# EAGLE board Joystick (EAGLE 9.6.0)
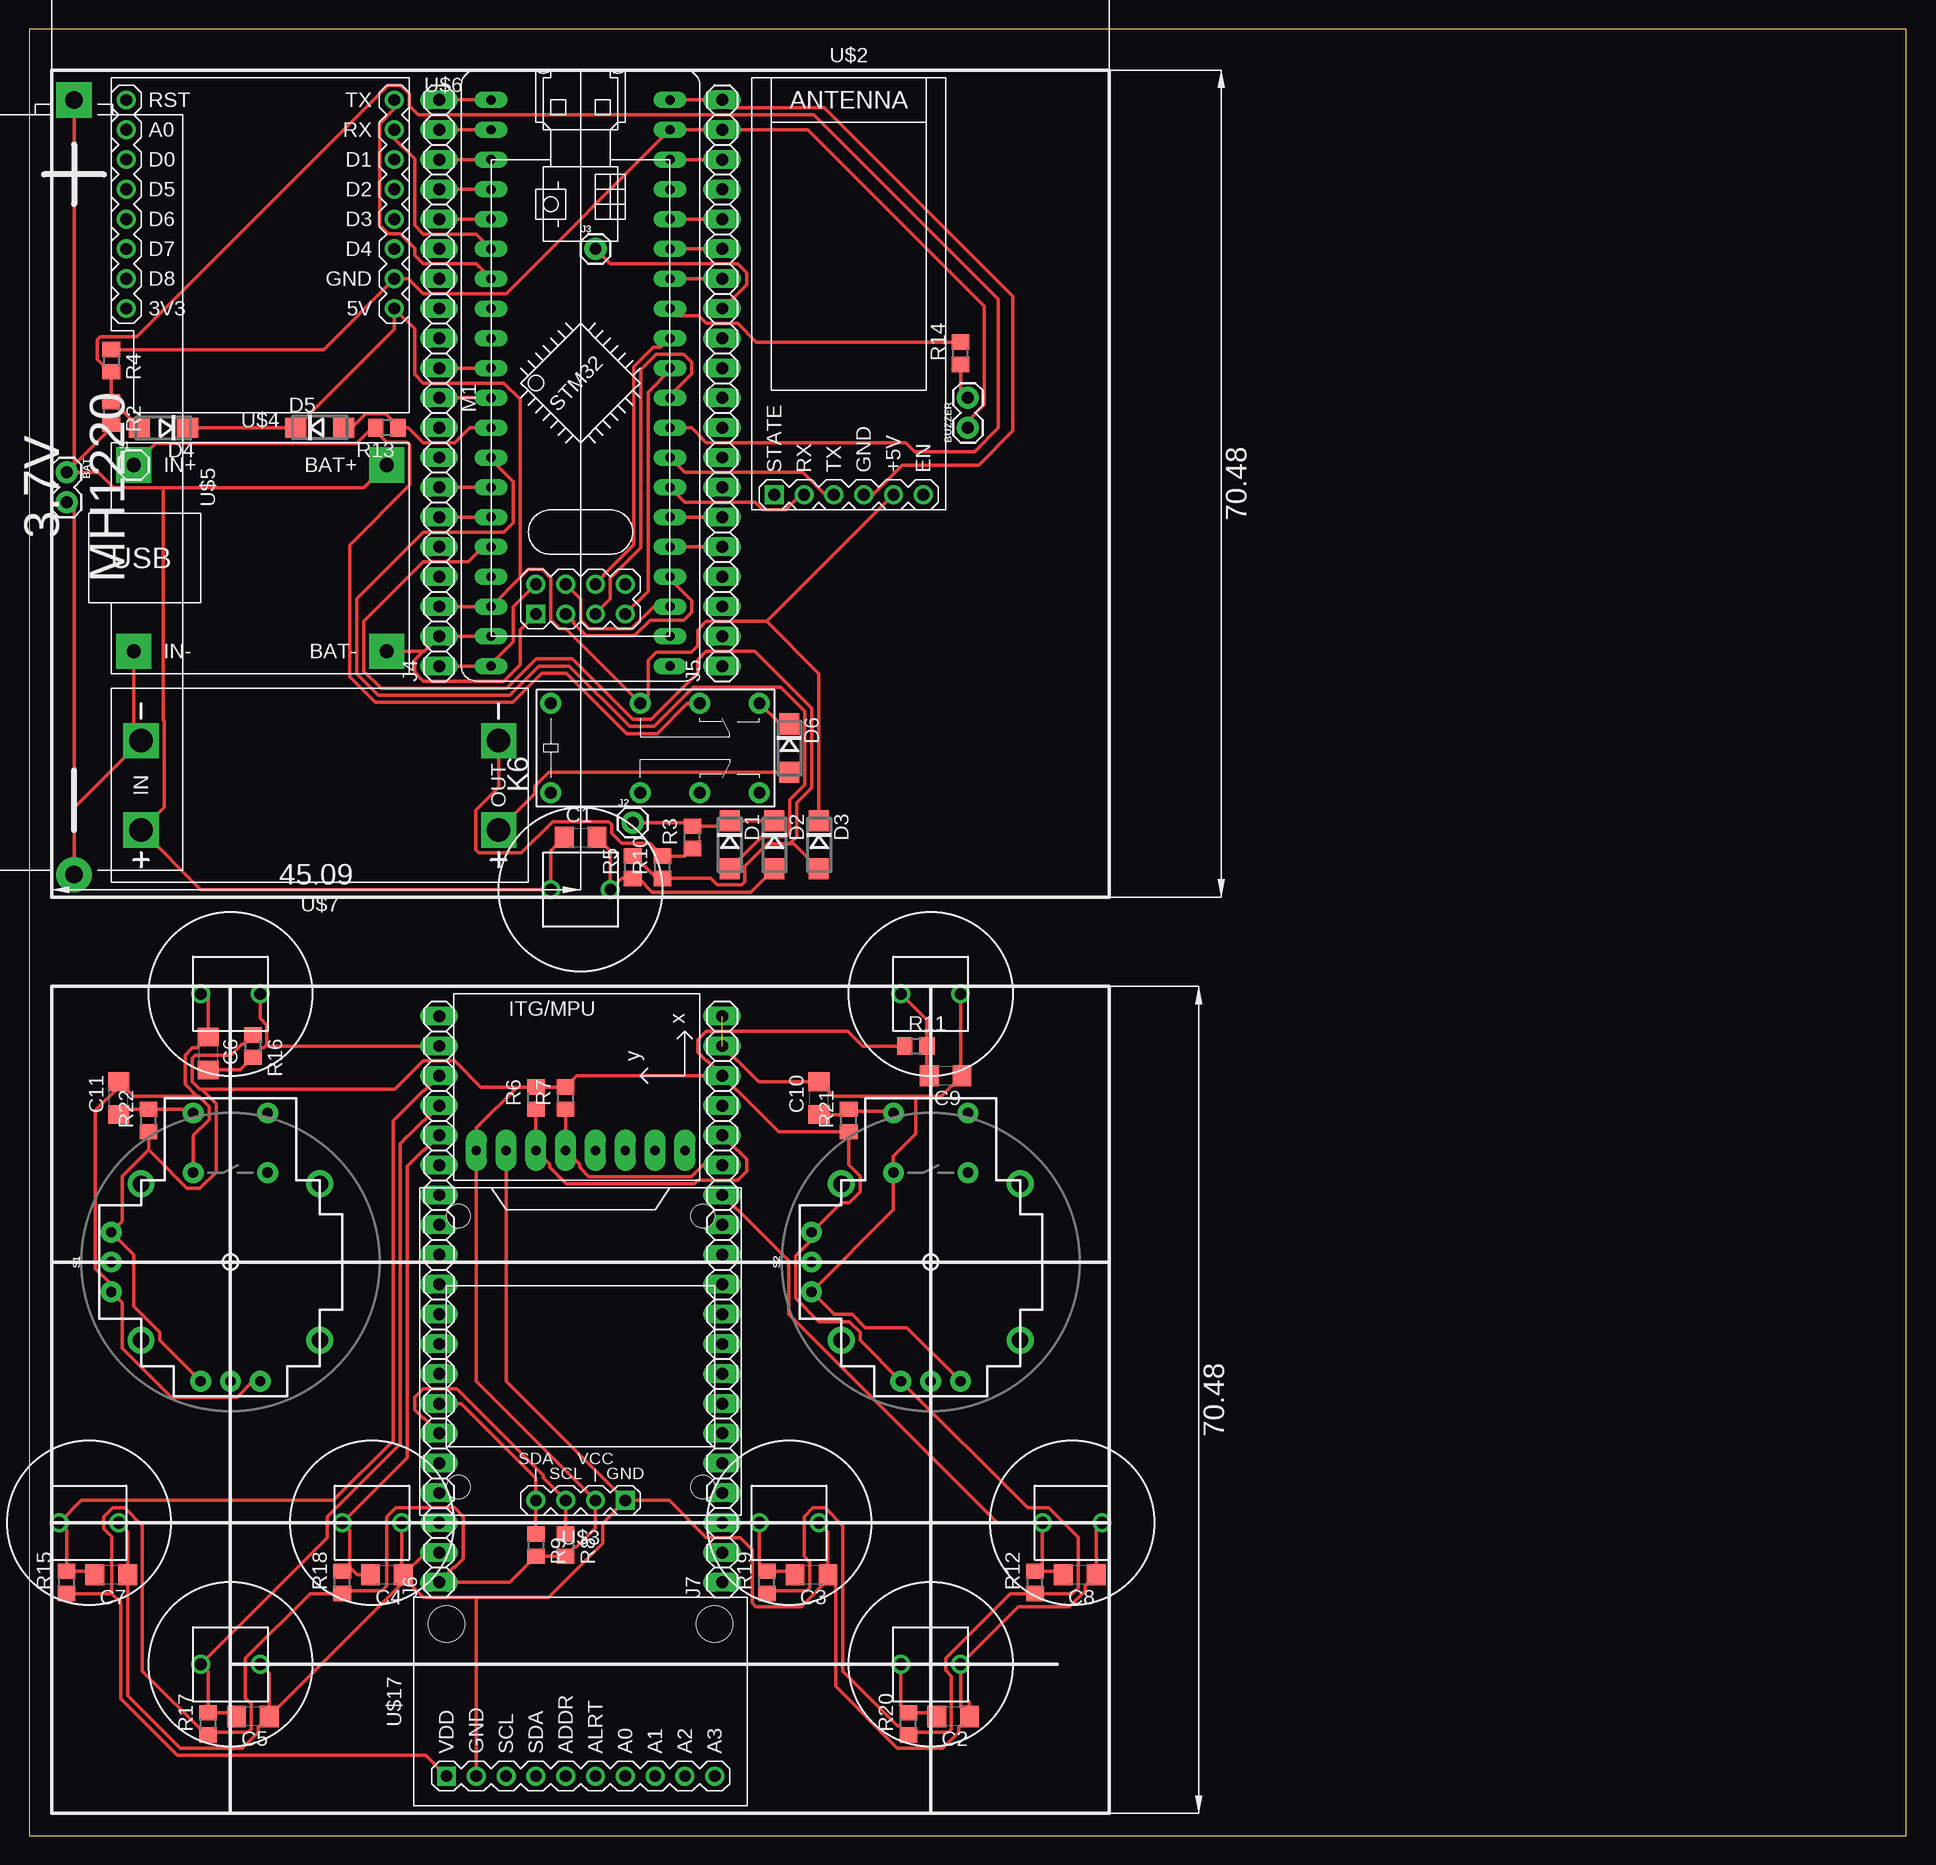
[diagram p0: board, top side]
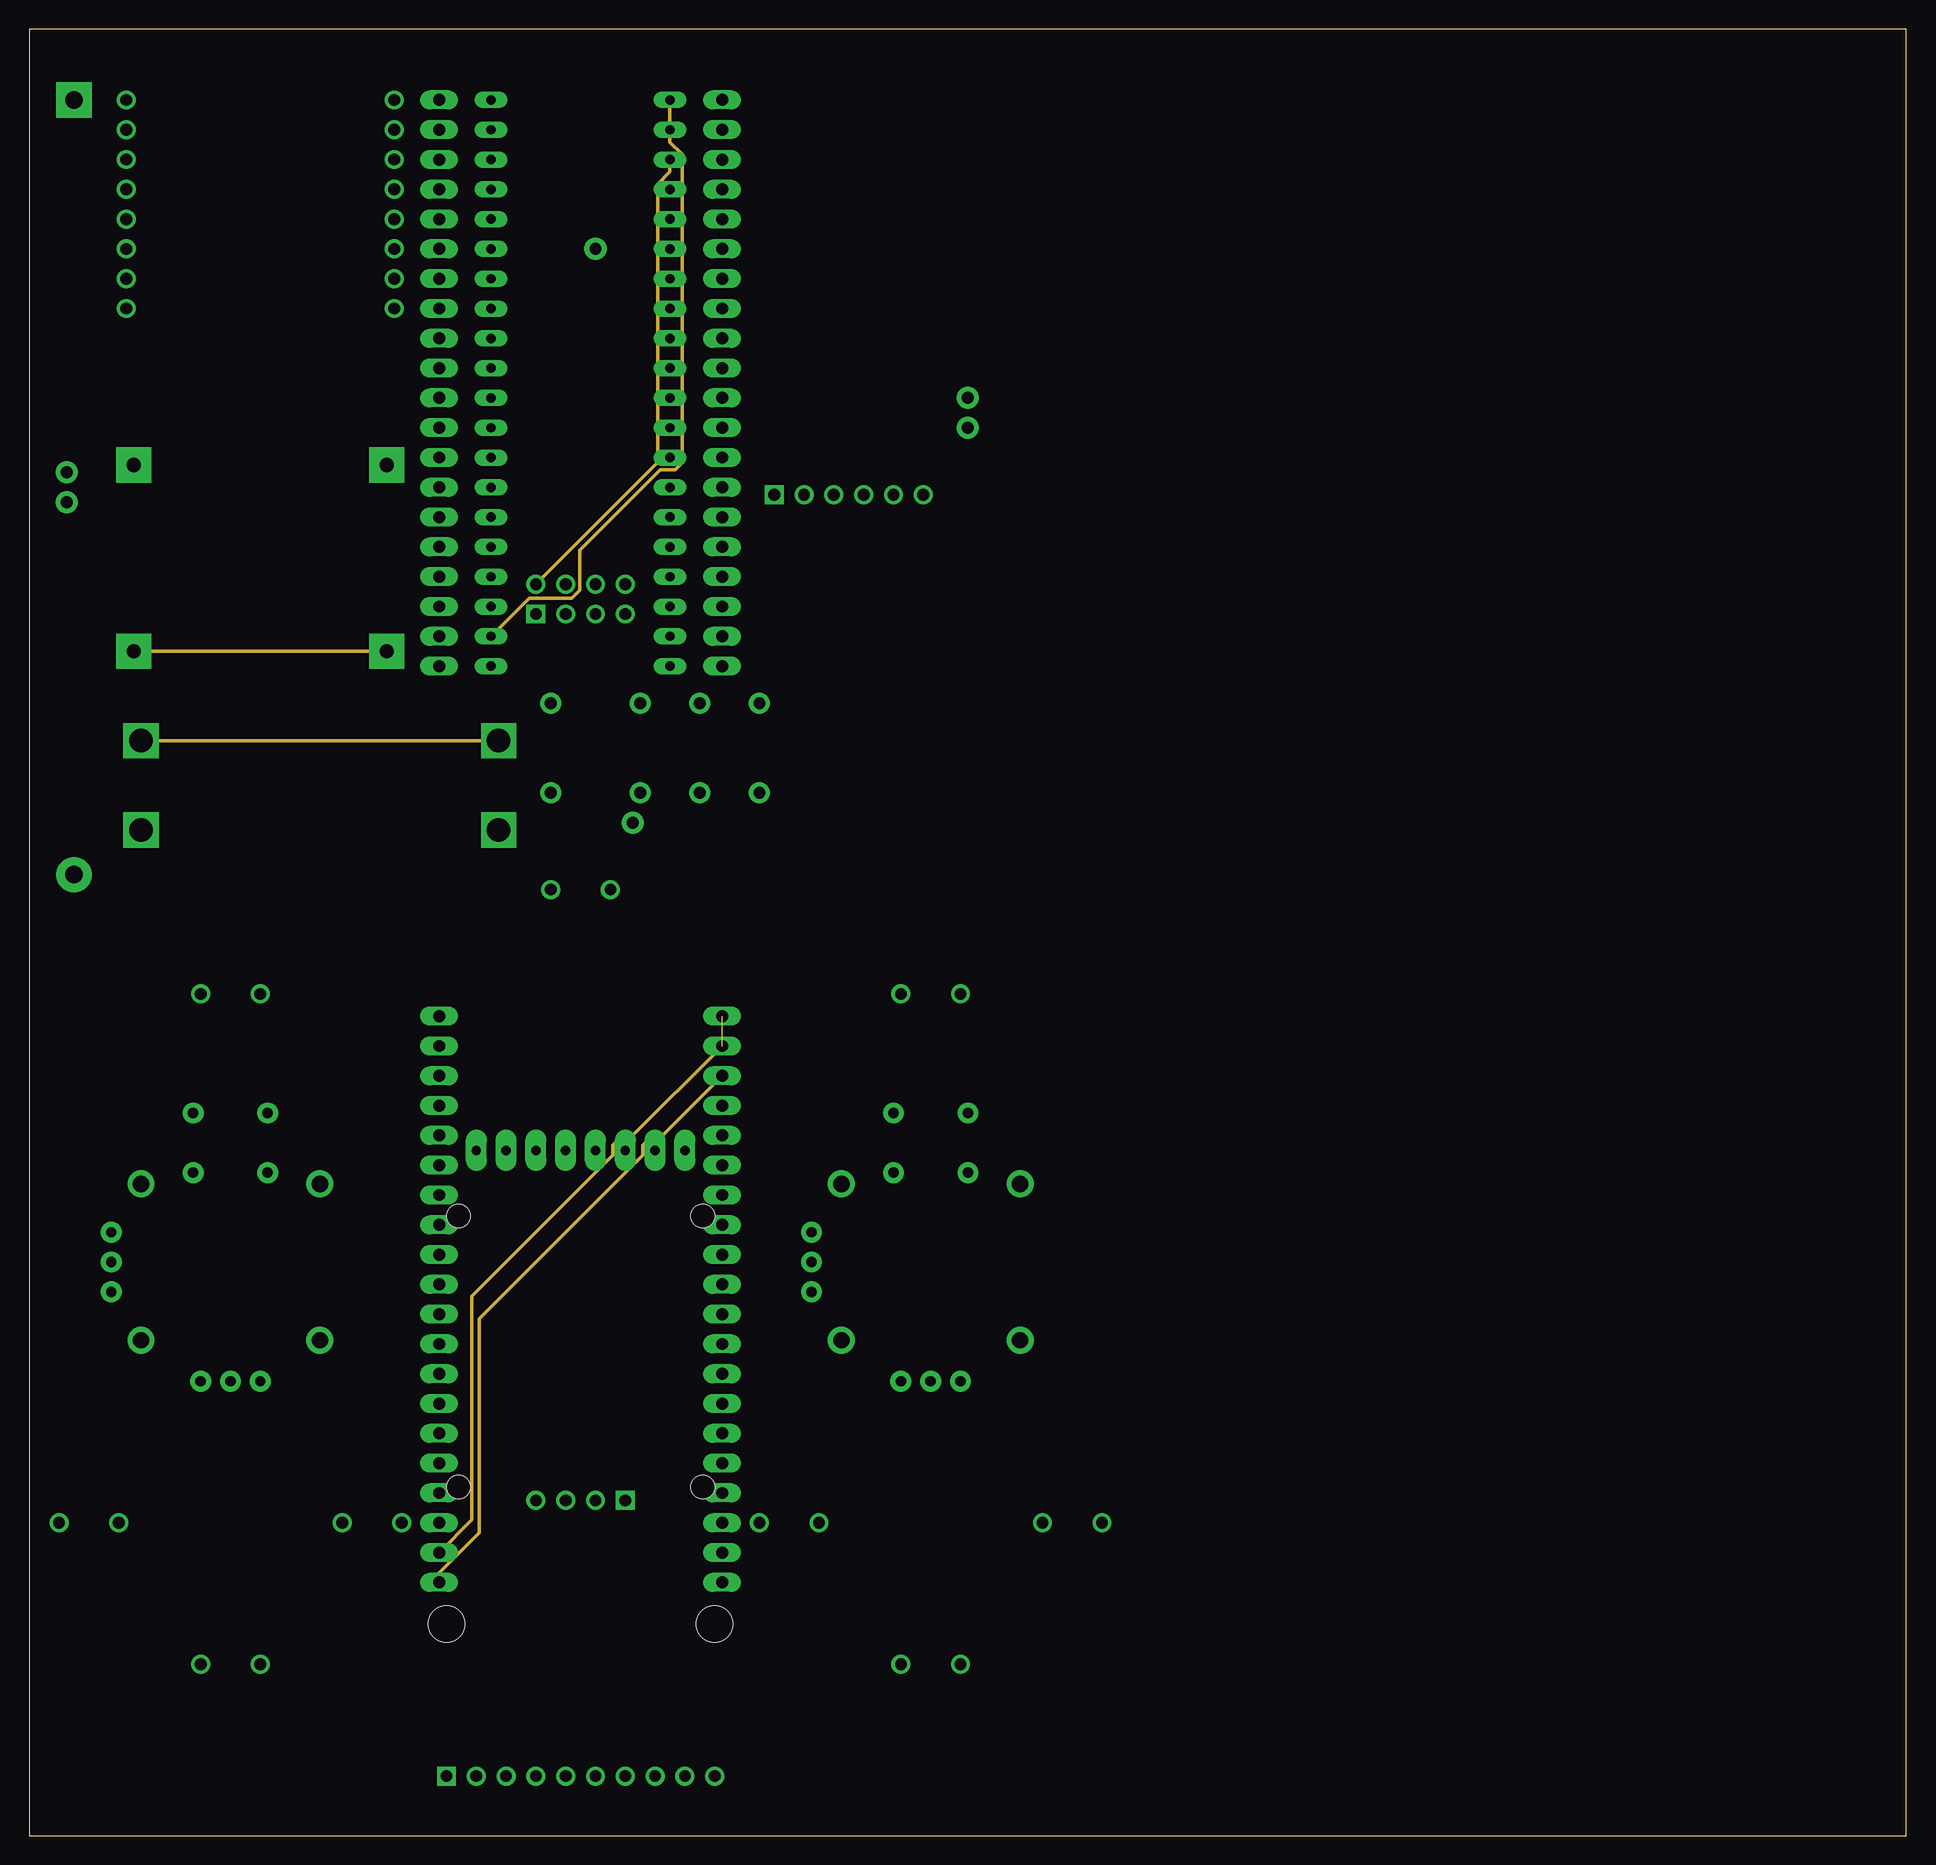
[diagram p1: board, inner layer Route2]
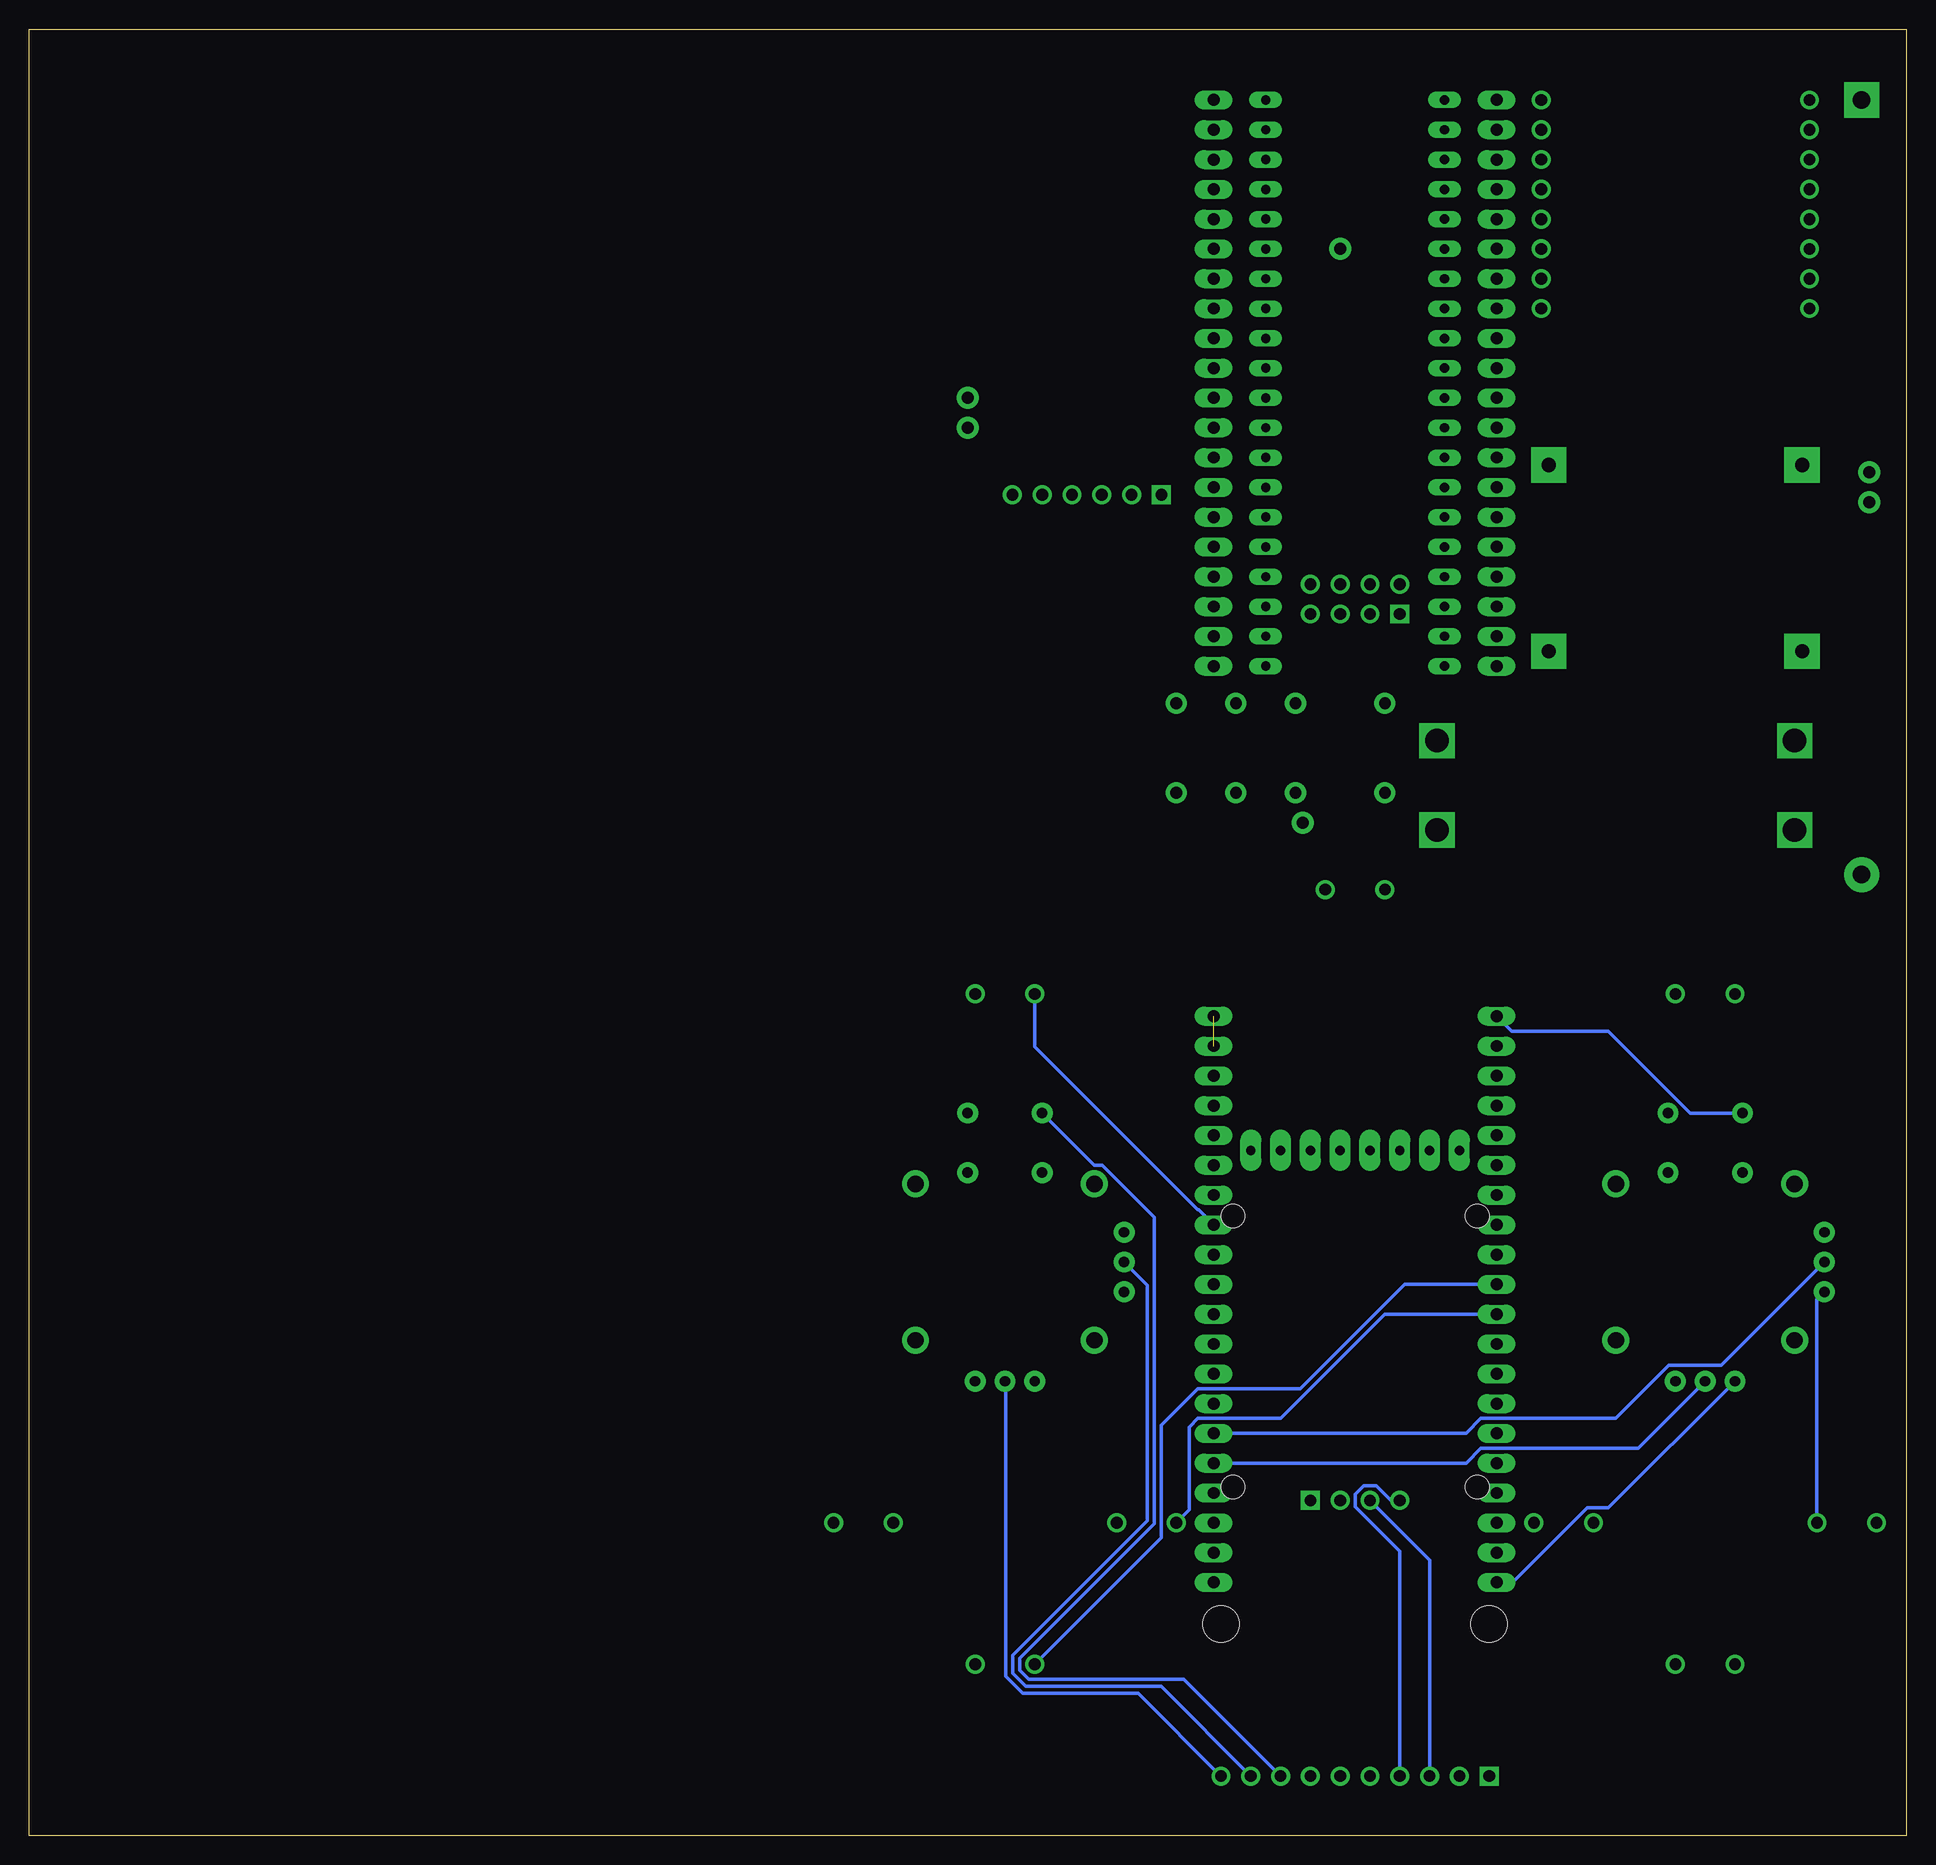
[diagram p2: board, bottom side, seen from below]

Size 160 x 153.97 mm. Coordinates in mm from the lower left corner, seen from the top.
Outline: 0,0 160,0 160,153.97 0,153.97 0,0
Copper layers (1*2*15*16): Top 0.035mm / dielectric 1.5mm / Route2 0.035mm / dielectric 0.15mm / Route15 0.035mm / dielectric 0.2mm / Bottom 0.035mm
Design rules "default *": minimum track width 12mil, minimum drill 0.35mm, track to track 12mil, track to pad 12mil, pad to pad 12mil, via to via 12mil, smd to smd 0mil, copper to edge 0mil, drill to drill 0mil, minimum pad ring 12mil, minimum via ring 12mil, stop-mask expansion 4mil, vias tented up to drill 0mil, thermal gap 0mil

## Footprints (pad centres in the part's own frame; a part is rotated, then mirrored left to right if it is on the bottom)
1X02 = drill 1.016 pad 1.88: 1 0,0; 2 2.54,0
C1206 = smd 1.6 x 1.8: 1 -1.4,0; 2 1.4,0
DO214AC = smd 1.8 x 1.7: A 2.05,0; C -2.05,0
1X01 = drill 1.016 pad 1.88: 1 0,0
1X20 = drill 1.016 long: 1 -24.13,0; 2 -21.59,0; 3 -19.05,0; 4 -16.51,0; 5 -13.97,0; 6 -11.43,0; 7 -8.89,0; 8 -6.35,0; 9 -3.81,0; 10 -1.27,0; 11 1.27,0; 12 3.81,0; 13 6.35,0; 14 8.89,0; 15 11.43,0; 16 13.97,0; 17 16.51,0; 18 19.05,0; 19 21.59,0; 20 24.13,0
G5V-2 = drill 1 pad 1.8: 1 -8.89,-3.81; 4 -1.27,-3.81; 6 3.81,-3.81; 8 8.89,-3.81; 9 8.89,3.81; 11 3.81,3.81; 13 -1.27,3.81; 16 -8.89,3.81
WIRELESS-NRF24L01-PA-EXT = drill 1 square: 1 -18.415,3.81 | drill 1: 2 -15.875,3.81; 3 -18.415,1.27; 4 -15.875,1.27; 5 -18.415,-1.27; 6 -15.875,-1.27; 7 -18.415,-3.81; 8 -15.875,-3.81
R0805 = smd 1.3 x 1.5: 1 -0.95,0; 2 0.95,0
JOYSTICK = drill 0.9 pad 1.778: B1A -3.175,12.7; B1B 3.175,12.7; B2A -3.175,7.62; B2B 3.175,7.62 | drill 0.889 pad 1.778: H1 -2.54,-10.16; H2 0,-10.16; H3 2.54,-10.16; V1 -10.16,2.54; V2 -10.16,0; V3 -10.16,-2.54 | drill 1.397 pad 2.286: MOUNT1 -7.62,6.668; MOUNT2 -7.62,-6.668; MOUNT3 7.62,-6.668; MOUNT4 7.62,6.668
GY-521 = drill 0.8 pad 1.778 long: ADO -8.89,-6.35; GND -8.89,6.35; INT -8.89,-8.89; SCL -8.89,3.81; SDA -8.89,1.27; VCC -8.89,8.89; XCL -8.89,-3.81; XDA -8.89,-1.27
BLUE_PILL = drill 0.8 long: P$1 -7.62,15.24; P$2 -7.62,12.7; P$3 -7.62,10.16; P$4 -7.62,7.62; P$5 -7.62,5.08; P$6 -7.62,2.54; P$7 -7.62,0; P$8 -7.62,-2.54; P$9 -7.62,-5.08; P$10 -7.62,-7.62; P$11 -7.62,-10.16; P$12 -7.62,-12.7; P$13 -7.62,-15.24; P$14 -7.62,-17.78; P$15 -7.62,-20.32; P$16 -7.62,-22.86; P$17 -7.62,-25.4; P$18 -7.62,-27.94; P$19 -7.62,-30.48; P$20 -7.62,-33.02; P$21 7.62,15.24; P$22 7.62,12.7; P$23 7.62,10.16; P$24 7.62,7.62; P$25 7.62,5.08; P$26 7.62,2.54; P$27 7.62,0; P$28 7.62,-2.54; P$29 7.62,-5.08; P$30 7.62,-7.62; P$31 7.62,-10.16; P$32 7.62,-12.7; P$33 7.62,-15.24; P$34 7.62,-17.78; P$35 7.62,-20.32; P$36 7.62,-22.86; P$37 7.62,-25.4; P$38 7.62,-27.94; P$39 7.62,-30.48; P$40 7.62,-33.02
WIRELESS-BLUETOOTH-HC-05 = drill 1 square: 1 -6.35,-17.145 | drill 1: 2 -3.81,-17.145; 3 -1.27,-17.145; 4 1.27,-17.145; 5 3.81,-17.145; 6 6.35,-17.145
DISPLAY-OLED-128X64-I2C = drill 1 square: 1 -3.81,12.7 | drill 1: 2 -1.27,12.7; 3 1.27,12.7; 4 3.81,12.7 | hole 2: -10.414,11.557; 10.414,11.557; 10.414,-11.557; -10.414,-11.557
BATTERY-CHARGER-LI-5V = drill 1.2 pad 3 square: BAT+ 10.795,8.255; BAT- 10.795,-7.62; IN+ -10.795,8.255; IN- -10.795,-7.62
BATTERY-LI-MH12210 = drill 1.5 pad 3 square: BAT+ -33.02,0 | drill 1.5 pad 3: BAT- 33.02,0
WEMOS-D1-MINI-SHIELD = drill 1: JP1.1 -11.43,12.065; JP1.2 -11.43,9.525; JP1.3 -11.43,6.985; JP1.4 -11.43,4.445; JP1.5 -11.43,1.905; JP1.6 -11.43,-0.635; JP1.7 -11.43,-3.175; JP1.8 -11.43,-5.715; JP2.1 11.43,12.065; JP2.2 11.43,9.525; JP2.3 11.43,6.985; JP2.4 11.43,4.445; JP2.5 11.43,1.905; JP2.6 11.43,-0.635; JP2.7 11.43,-3.175; JP2.8 11.43,-5.715
DC-DC-STEP-UP-MT3608 = drill 2 pad 2.8 square: IN+ 15.24,3.81; IN- 15.24,-3.81; OUT+ -15.24,3.81; OUT- -15.24,-3.81
MOUSE_BT = drill 1: P$1 -2.54,0; P$2 2.54,0
ADC-4CH-ADS1115 = drill 1 square: 1 -6.35,11.43 | drill 1: 2 -6.35,8.89; 3 -6.35,6.35; 4 -6.35,3.81; 5 -6.35,1.27; 6 -6.35,-1.27; 7 -6.35,-3.81; 8 -6.35,-6.35; 9 -6.35,-8.89; 10 -6.35,-11.43 | hole 3.1: 6.604,11.43; 6.604,-11.43

## Placement (x,y rotation side)
BAT  [1X02]  3.17,116.2 270 top
BUZZER  [1X02]  80.01,120.02 90 top
C1  [C1206]  46.99,85.09 0 top
C2  [C1206]  78.74,10.16 180 top
C3  [C1206]  66.67,22.23 180 top
C4  [C1206]  30.48,22.23 180 top
C5  [C1206]  19.05,10.16 180 top
C6  [C1206]  15.24,66.67 270 top
C7  [C1206]  6.99,22.23 180 top
C8  [C1206]  89.53,22.23 180 top
C9  [C1206]  78.11,64.77 180 top
C10  [C1206]  67.31,62.87 90 top
C11  [C1206]  7.62,62.87 90 top
D1  200mA/100V/1V  [DO214AC]  59.69,84.45 270 top
D2  200mA/100V/1V  [DO214AC]  63.5,84.45 270 top
D3  200mA/100V/1V  [DO214AC]  67.31,84.45 270 top
D4  200mA/100V/1V  [DO214AC]  11.43,120.02 180 top
D5  200mA/100V/1V  [DO214AC]  24.77,120.02 0 top
D6  200mA/100V/1V  [DO214AC]  64.77,92.71 270 top
J1  [1X01]  8.89,116.84 0 top
J2  [1X01]  51.44,86.36 0 top
J3  [1X01]  48.26,135.25 0 top
J4  [1X20]  34.92,123.82 90 top
J5  [1X20]  59.05,123.82 90 top
J6  [1X20]  34.92,45.72 90 top
J7  [1X20]  59.05,45.72 90 top
K6  G5V-2  [G5V-2]  53.34,92.71 0 top
M1  WIRELESS-NRF24L01-PA-EXT  [WIRELESS-NRF24L01-PA-EXT]  46.99,122.56 90 top
R2  100k  [R0805]  6.99,121.28 270 top
R3  100k  [R0805]  56.52,85.09 90 top
R4  100k  [R0805]  6.99,125.73 270 top
R5  100k  [R0805]  51.44,82.55 90 top
R6  10k  [R0805]  43.18,62.87 90 top
R7  10k  [R0805]  45.72,62.87 90 top
R8  10k  [R0805]  45.72,24.77 270 top
R9  10k  [R0805]  43.18,24.77 270 top
R10  100k  [R0805]  53.98,82.55 90 top
R11  100k  [R0805]  75.56,67.31 0 top
R12  100k  [R0805]  85.72,21.59 90 top
R13  100k  [R0805]  30.48,120.02 180 top
R14  4.99K  [R0805]  79.38,126.37 90 top
R15  100k  [R0805]  3.17,21.59 90 top
R16  100k  [R0805]  19.05,67.31 270 top
R17  100k  [R0805]  15.24,9.52 90 top
R18  100k  [R0805]  26.67,21.59 90 top
R19  100k  [R0805]  62.87,21.59 90 top
R20  100k  [R0805]  74.93,9.52 90 top
R21  100k  [R0805]  69.85,60.96 90 top
R22  100k  [R0805]  10.16,60.96 90 top
S1  JOYSTICK_THUMB  [JOYSTICK]  17.14,48.9 0 top
S2  JOYSTICK_THUMB  [JOYSTICK]  76.83,48.9 0 top
U1  GY-521MPU6050  [GY-521]  46.99,67.31 90 top
U$1  [BLUE_PILL]  46.99,132.72 0 top
U$2  WIRELESS-BLUETOOTH-HC-05  [WIRELESS-BLUETOOTH-HC-05]  69.85,131.44 0 top
U$3  DISPLAY-OLED-128X64-I2C  [DISPLAY-OLED-128X64-I2C]  46.99,41.28 180 top
U$4  BATTERY-CHARGER-LI-5V  [BATTERY-CHARGER-LI-5V]  19.68,108.59 0 top
U$5  BATTERY-LI-MH12210  [BATTERY-LI-MH12210]  3.81,114.94 270 top
U$6  WEMOS-D1-MINI-SHIELD  [WEMOS-D1-MINI-SHIELD]  19.68,135.89 0 top
U$7  DC-DC-STEP-UP-MT3608  [DC-DC-STEP-UP-MT3608]  24.77,89.53 180 top
U$8  MOUSE_BT  [MOUSE_BT]  46.99,80.65 180 top
U$9  MOUSE_BT  [MOUSE_BT]  76.83,71.75 0 top
U$10  MOUSE_BT  [MOUSE_BT]  88.9,26.67 0 top
U$11  MOUSE_BT  [MOUSE_BT]  76.83,14.61 0 top
U$12  MOUSE_BT  [MOUSE_BT]  17.14,71.75 180 top
U$13  MOUSE_BT  [MOUSE_BT]  5.08,26.67 0 top
U$14  MOUSE_BT  [MOUSE_BT]  17.14,14.61 0 top
U$15  MOUSE_BT  [MOUSE_BT]  64.77,26.67 0 top
U$16  MOUSE_BT  [MOUSE_BT]  29.21,26.67 0 top
U$17  ADC-4CH-ADS1115  [ADC-4CH-ADS1115]  46.99,11.43 90 top

## Library data of the parts
BAT BUZZER J1-J3 = SparkFun-Connectors
C1-C11 = rcl; SPICEPREFIX: C
D1-D6 = diode
J4-J7 = adafruit
K6 = relay; MPN: G5V-2 5DC; OC_FARNELL: 9949488; OC_NEWARK: 78K5703
M1 U$2-U$7 U$17 = diy-modules
R2-R22 = rcl; SPICEPREFIX: R
S1 S2 = SparkFun-Switches; PROD_ID: COMP-09744; SF_SKU: COM-09032
U1 = gy-521
U$1 = BluePill
U$8-U$16 = MOUSE_BT

## Nets
3V3: U$6.JP1.8
3V3_: J4.1 J5.18 M1.2 U$1.P$20 U$1.P$23
3V3_S: J6.1 J7.18 R6.2 R7.2 R8.2 R9.2 R11.1 R12.1 R15.1 R16.1 R17.1 R18.1 R19.1 R20.1 R21.1 R22.1 S1.H1 S1.V1 S2.H1 S2.V1 U1.VCC U$3.2 U$17.1
5V: D3.C D4.C D5.C J4.3 K6.13 U$1.P$18 U$2.5 U$6.JP2.8
5V_S: J6.3
ASD: BUZZER.2 R14.1
BAT: D4.A R2.1 R4.2 U$1.P$32
BAT+: BAT.1 C1.1 R2.2 U$4.BAT+ U$5.BAT+ U$7.IN+ U$8.P$2
BT_RX: U$1.P$33 U$2.3
BT_TX: U$1.P$34 U$2.2
BUTTON: C1.2 D2.A R5.1 U$8.P$1
BUTTON_E: J4.11 U$1.P$10
BUTTON_E_S: C2.2 J6.11 R20.2 U$11.P$1
BUTTON_F: J4.10 U$1.P$11
BUTTON_F_S: C3.2 J6.10 R19.2 U$15.P$1
BUZZ: R14.2 U$1.P$28
CE: M1.3 U$1.P$37
CONVERTER: D6.C K6.9
CSN: M1.4 U$1.P$38
DOWN: J4.17 U$1.P$4
DOWN_S: C5.2 J6.17 R17.2 U$14.P$1
ENABLE: D1.C D2.C J2.1 R3.2
GGJHGJ: U$1.P$39
GND: BAT.2 BUZZER.1 J4.2 J5.19 J5.20 M1.1 R3.1 R4.1 R10.2 U$1.P$19 U$1.P$21 U$1.P$22 U$2.4 U$4.BAT- U$4.IN- U$5.BAT- U$6.JP2.7 U$7.IN- U$7.OUT-
GND_S: C2.1 C3.1 C4.1 C5.1 C6.1 C7.1 C8.1 C9.1 C10.2 C11.2 J6.2 J7.19 J7.20 S1.B2A S1.H3 S1.V3 S2.B2A S2.H3 S2.V3 U1.GND U$3.1 U$9.P$2 U$10.P$2 U$11.P$2 U$12.P$2 U$13.P$2 U$14.P$2 U$15.P$2 U$16.P$2 U$17.2
HORISONTAL: J5.5 U$1.P$36
HORISONTAL2_S: S2.H2 U$17.10
HORISONTAL_S: J7.5 S1.H2
LEFT: J4.16 U$1.P$5
LEFT_BT: J5.14 U$1.P$27
LEFT_BT_S: C8.2 J7.14 R12.2 U$10.P$1
LEFT_S: C4.2 J6.16 R18.2 U$16.P$1
MISO: M1.7 U$1.P$30
MOS: U$1.P$17
MOSI: M1.6 U$1.P$29
N$1: D6.A U$7.OUT+
N$4: K6.16
ON: D1.A U$1.P$13
POW_BT: D3.A R5.2 R10.1 U$1.P$16
RIGHT: J4.18 U$1.P$3
RIGHT_BT: J3.1 J5.13
RIGHT_BT_S: C9.2 J7.13 R11.2 U$9.P$1
RIGHT_S: C7.2 J6.18 R15.2 U$13.P$1
RX: U$1.P$7 U$6.JP2.1
SCK: M1.5 U$1.P$31
SCL: J4.6 U$1.P$15
SCL_IMU: J5.15 U$1.P$26
SCL_IMU_S: J7.15 R7.1 U1.SDA
SCL_S: J6.6 R8.1 U$3.3 U$17.3
SDA: J4.7 U$1.P$14
SDA_IMU: J5.16 U$1.P$25
SDA_IMU_S: J7.16 R6.1 U1.SCL
SDA_S: J6.7 R9.1 U$3.4 U$17.4
SELECT: J4.20 U$1.P$1
SELECT2_S: C10.1 R21.2 S2.B1A U$17.8
SELECT_S: C11.1 J6.20 R22.2 S1.B1A
TX: U$1.P$6 U$6.JP2.2
UP: J4.19 U$1.P$2
UP_S: C6.2 J6.19 R16.2 U$12.P$1
VERTICAL: J5.6 U$1.P$35
VERTICAL2_S: S2.V2 U$17.9
VERTICAL_S: J7.6 S1.V2
VIN: J1.1 K6.11 R13.2 U$4.IN+
VIN_PIN: D5.A R13.1 U$1.P$12

## Tracks (layer width: path | path; a pad name or v marks a point on that pad's centre or on a via)
3V3_
  Top 0.305: U$1.P$23 J5.18 | J4.1 U$1.P$20 39.37,99.89 41.24,101.75 41.24,104.74 M1.2
  Route2 0.305: M1.2 53.55,117.05 53.55,140.77 54.61,141.83 U$1.P$23
3V3_S
  Top 0.305: R15.1 7.02,20.64 | 15.24,8.43 15.24,8.26 | 7.02,20.64 7.02,25.49 6.36,26.15 6.36,27.19 7.1,27.93 8.14,27.93 9.64,26.43 9.64,14.03 15.24,8.43 | 15.24,8.43 R17.1 15.47,8.8 18.64,8.8 18.91,9.07 18.91,11.25 18.42,11.73 18.42,15.13 23.93,20.64 R18.1 26.9,20.87 30.07,20.87 30.49,21.29 30.49,24.14 | 30.49,24.14 30.48,24.13 | 30.49,24.14 30.49,27.19 31.23,27.94 36.26,27.94 37.01,27.2 37.01,23.6 36.26,22.86 36.2,22.86 J6.1 40.95,21.59 R9.2 R8.2 46.51,24.61 46.66,24.61 48.26,26.21 U$3.2 38.1,38.73 U1.VCC 38.1,60.33 41.59,63.81 | 41.59,63.81 R6.2 R7.2 46.67,64.77 J7.18 | R22.1 10.16,58.46 | 10.16,58.46 7.92,56.23 7.92,52.38 S1.V1 8.89,49.53 8.89,45.13 11.12,42.89 11.12,42.22 S1.H1 | R16.1 18.26,67.47 18.11,67.47 17.18,66.53 14.15,66.53 13.88,66.26 13.88,64.29 14.54,63.63 14.7,63.63 14.72,63.61 | 14.72,63.61 15.93,62.41 15.93,56.57 14.53,55.17 13.41,55.17 12.09,56.49 12.09,56.53 10.16,58.46 | 14.72,63.61 31.16,63.61 33.59,66.04 36.26,66.04 38.49,63.81 41.59,63.81 | 7.02,20.64 7.78,19.88 7.78,11.68 12.6,6.86 33.78,6.86 U$17.1 | R19.1 63.09,20.87 66.26,20.87 66.53,21.14 66.53,23.31 66.04,23.81 66.04,27.19 66.79,27.93 67.83,27.93 69.33,26.43 69.33,14.03 73.99,9.37 74.14,9.37 R20.1 75.16,8.8 78.33,8.8 78.6,9.07 78.6,13.6 78.11,14.08 78.11,15.13 83.62,20.64 R12.1 88.9,20.64 89.39,21.14 89.39,25.42 86.88,27.93 85.1,27.93 S2.H1 70.81,42.22 70.81,42.89 69.88,43.83 67.3,43.83 65.33,45.8 65.33,49.45 66.67,50.8 S2.V1 69.2,53.96 69.88,53.96 70.81,54.9 70.81,56.23 69.85,57.19 R21.1 63.88,60.01 60.39,63.5 60.33,63.5 J7.18 | J7.18 57.78,66.04 57.72,66.04 56.97,66.78 56.97,67.84 57.72,68.58 69.77,68.58 71.04,67.31 R11.1
  Route2 0.305: J7.18 53.76,59.48 52.9,59.48 52.28,58.86 52.28,58 38.34,44.05 38.34,25.82 34.92,22.41 J6.1
  Bottom 0.305: S1.H1 25.41,27.93 27.19,27.93 33.53,21.59 J6.1
5V
  Top 0.305: U$1.P$18 J4.3 | 39.49,104.78 U$1.P$18 | D4.C D5.C 31.11,128.41 U$6.JP2.8 32.84,128.45 32.84,124.57 33.59,123.82 40.45,123.82 41.85,122.43 41.85,107.38 41.91,107.31 | 62.87,103.5 U$2.5 | 62.87,103.5 57.72,103.5 56.97,102.76 56.97,101.42 56.41,100.86 53.42,100.86 52.74,100.18 52.74,97.19 K6.13 45.71,102.88 45.2,102.88 44.44,103.63 44.44,107.2 43.7,107.94 42.54,107.94 41.91,107.31 | U$1.P$18 41.91,107.31 | D3.C 67.31,99.06 62.87,103.5
ASD
  Top 0.305: R14.1 79.38,123.19 BUZZER.2
BAT
  Top 0.305: R4.2 R2.1 | R2.1 7.78,121.44 7.92,121.44 9.35,120.02 D4.A | R2.1 6.99,124.63 5.78,125.84 5.78,127.52 6.05,127.79 9.16,127.79 30.6,149.22 30.61,149.22 31.64,149.22 32.38,148.48 32.38,147.45 33.14,146.69 66.87,146.69 82.6,130.95 82.6,120 80.59,117.98 75.47,117.98 74.7,118.75 57.72,118.75 56.45,120.02 U$1.P$32
BAT+
  Top 0.305: BAT.1 5.88,116.2 7.2,114.88 11.43,114.88 | 11.43,114.88 28.52,114.88 U$4.BAT+ | U$5.BAT+ 3.81,116.84 BAT.1 | BAT.1 6.99,120.02 R2.2 | 11.43,114.88 11.43,95.09 11.48,95.03 11.48,87.68 U$7.IN+ 14.61,80.65 U$8.P$2 44.45,83.95 C1.1
BT_RX
  Top 0.305: U$2.3 67.83,114.3 65.92,116.2 55.88,116.2 U$1.P$33
BT_TX
  Top 0.305: U$2.2 65.76,114.3 64.49,113.04 62.51,113.04 61.88,113.66 55.88,113.66 U$1.P$34
BUTTON
  Top 0.305: D2.A 61.51,80.41 53.12,80.41 51.93,81.6 R5.1 50.48,81.6 U$8.P$1 49.53,83.95 C1.2
BUTTON_E
  Top 0.305: J4.11 U$1.P$10
BUTTON_E_S
  Top 0.305: U$11.P$1 74.3,11.11 R20.2 77.03,10.48 C2.2
  Bottom 0.305: U$11.P$1 63.49,25.41 63.49,35 60.39,38.1 51.66,38.1 42.77,46.99 J6.11
BUTTON_F
  Top 0.305: U$1.P$11 J4.10
BUTTON_F_S
  Top 0.305: C3.2 64.96,22.54 R19.2 62.23,23.18 U$15.P$1
  Bottom 0.305: J6.10 44.45,44.45 53.34,35.56 60.39,35.56 61.14,34.82 61.14,27.76 U$15.P$1
BUZZ
  Top 0.305: U$1.P$28 55.24,129.54 57.08,129.54 57.72,128.91 60.39,128.91 61.98,127.31 R14.2
CE
  Top 0.305: M1.3 46.39,103.47 46.39,103.37 47.48,102.27 51.58,102.27 52.92,103.61 55.8,103.61 56.48,104.29 56.48,105.26 54.61,107.12 U$1.P$37
CONVERTER
  Top 0.305: D6.C 63.99,94.76 K6.9
CSN
  Top 0.305: M1.4 47,105.4 47,103.62 47.74,102.88 51.32,102.88 53.22,104.78 U$1.P$38
DOWN
  Top 0.305: J4.17 U$1.P$4
DOWN_S
  Top 0.305: C5.2 17.34,10.48 R17.2 15.24,13.97 U$14.P$1 25.41,25.41 25.41,27.19 31.62,33.41 31.62,59 32.23,59.61 32.35,59.72 33.59,60.96 33.66,60.96 J6.17
ENABLE
  Top 0.305: D2.C D1.C 59.23,86.04 R3.2 56.2,86.36 J2.1
GND
  Top 0.305: U$1.P$21 J5.20 59.72,147.29 67.75,147.29 83.84,131.2 83.84,119.74 80.94,116.83 74.41,116.83 71.88,114.3 U$2.4 | U$1.P$19 J4.2 33.66,100.97 33.59,100.97 | M1.1 41.85,102.81 41.85,99.82 40.45,98.43 33.59,98.43 32.84,99.17 32.84,100.22 33.59,100.97 | 33.59,100.97 U$4.BAT- | R4.1 25.08,126.68 U$6.JP2.7 32.32,132.72 33.59,131.44 40.64,131.44 U$1.P$22 J5.19 66.36,145.41 81.41,130.36 81.41,121.98 80.01,120.58 BUZZER.1 | U$4.IN- 8.89,93.98 U$7.IN- 3.81,87.63 U$5.BAT- 3.81,113.03 BAT.2 | U$7.OUT- 40.01,89.37 38.05,87.41 38.05,84.04 38.32,83.77 41.92,83.77 44.6,86.45 49.38,86.45 49.65,86.18 49.65,85.46 50.5,84.61 52.87,84.61 R10.2 55.88,83.5 R3.1
  Route2 0.305: U$4.IN- U$4.BAT- | U$7.IN- U$7.OUT- | U$1.P$19 42.61,105.47 46.22,105.47 46.93,106.18 46.93,109.56 53.78,116.42 55.05,116.42 55.67,117.04 55.67,143.31 54.61,144.37 U$1.P$22 U$1.P$21
GND_S  (1 unrouted)
  Top 0.305: U$14.P$2 20.45,13.84 C5.1 | C5.1 19.52,9.23 19.52,8.82 18.17,7.47 12.85,7.47 8.38,11.94 C7.1 8.38,25.91 U$13.P$2 | U$16.P$2 31.75,22.23 | 31.75,22.23 31.82,22.15 31.83,22.16 C4.1 33.78,24.13 J6.2 | 31.75,21.46 31.75,22.23 | C5.1 31.75,21.46 | U$3.1 48.87,26.65 48.87,24.92 44.27,20.32 38.1,20.32 | 31.75,21.46 32.45,21.46 33.59,20.32 38.1,20.32 | U1.GND 40.64,38.73 U$3.1 | 14.29,63.02 8.87,63.02 C11.2 7.62,63.81 5.64,61.83 5.64,48.34 6.99,46.99 S1.V3 7.92,45.41 7.92,41.56 12.1,37.39 17.7,37.39 19.05,38.73 S1.H3 | S1.B2A 13.97,59.69 15.32,61.04 15.32,62.15 14.45,63.02 14.29,63.02 | U$12.P$2 15.24,71.75 C6.1 14.31,67.14 13.9,67.14 13.27,66.52 13.27,64.03 14.29,63.02 | U$17.2 38.1,20.32 | U$10.P$2 90.94,26.17 C8.1 90,21.29 90,20.88 88.65,19.53 84.3,19.53 U$11.P$2 79.38,10.93 C2.1 | U$15.P$2 68.08,25.91 C3.1 68.33,21.97 | 68.33,21.97 68.72,21.58 68.72,12.74 73.99,7.47 77.86,7.47 79.21,8.82 79.21,9.23 C2.1 | C2.1 80.14,11.43 | 68.33,21.97 68.23,21.97 65.79,19.53 61.93,19.53 61.62,19.84 61.62,24.36 60.58,25.4 57.72,25.4 54.54,28.58 U$3.1 | J7.19 60.33,66.04 60.39,66.04 62.17,64.27 C10.2 68.56,63.02 75.56,63.02 | S2.H3 74.8,43.31 71.25,43.31 70.13,44.44 68.59,44.44 S2.V3 73.66,53.34 S2.B2A 73.66,57.91 75.56,59.82 75.56,63.02 | C9.1 79.44,64.7 | 79.44,64.7 77.75,63.02 75.56,63.02 | U$9.P$2 79.38,64.77 79.44,64.7
  Route2 0.305: J7.19 51.22,59.48 50.36,59.48 49.74,58.86 49.74,58 37.73,45.98 37.73,26.93 J6.2
  Bottom 0.305: S1.V3 7.62,45.72 U$13.P$2
HORISONTAL
  Top 0.305: U$1.P$36 J5.5
HORISONTAL2_S
  Bottom 0.305: U$17.10 65.46,12.12 75.32,12.12 76.78,13.58 76.78,38.68 S2.H2
HORISONTAL_S
  Bottom 0.305: J7.5 37.53,31.75 36.26,33.02 22.86,33.02 S1.H2
LEFT
  Top 0.305: U$1.P$5 J4.16
LEFT_BT
  Top 0.305: U$1.P$27 J5.14
LEFT_BT_S
  Top 0.305: C8.2 87.82,22.54 R12.2 86.36,23.18 U$10.P$1 82.51,26.67 64.72,44.46 64.72,49.02 60.39,53.34 60.33,53.34 J7.14
LEFT_S
  Top 0.305: 27.3,22.86 27.3,26.04 U$16.P$1 32.23,32.23 32.23,57.07 33.59,58.42 33.66,58.42 J6.16 | 27.3,22.86 R18.2 | C4.2 27.94,22.23 27.3,22.86
MISO
  Top 0.305: M1.7 52.74,106.08 52.74,123.04 54.61,124.9 U$1.P$30
MOSI
  Top 0.305: M1.6 48.93,107.35 48.93,107.45 51.52,110.05 51.52,125.22 53.17,126.87 53.84,126.87 U$1.P$29
N$1
  Top 0.305: U$7.OUT+ 43.09,88.81 43.09,89.46 44.29,90.66 D6.A
ON
  Top 0.305: U$1.P$13 39.37,117.28 41.24,115.42 41.24,111.91 40.45,111.12 33.59,111.12 27.91,105.45 27.91,99.02 29.73,97.21 40.95,97.21 43.44,99.69 46.04,99.69 51.18,94.55 53.26,94.55 56.59,97.88 64.05,97.88 66.08,95.85 66.08,89.57 64.81,88.3 64.81,85.42 64.63,85.23 64.54,85.15 62.43,85.15 D1.A
POW_BT
  Top 0.305: U$1.P$16 38.7,109.86 37.43,108.59 33.59,108.59 28.52,103.52 28.52,99.28 29.98,97.81 40.7,97.81 43.22,100.33 46.27,100.33 51.44,95.16 53.01,95.16 56.97,99.12 56.97,100.22 57.72,100.97 60.33,100.97 60.57,100.97 61.82,100.97 66.69,96.1 66.69,89.32 65.42,88.05 65.42,85.16 64.79,84.54 | R5.2 52.23,82.71 52.37,82.71 53.48,81.6 R10.1 58.1,81.6 58.65,81.05 60.73,81.05 61,81.32 61,82.62 62.91,84.54 64.79,84.54 | D3.A 65.18,84.54 64.79,84.54
RIGHT
  Top 0.305: J4.18 U$1.P$3
RIGHT_BT
  Top 0.305: J3.1 49.53,133.99 60.39,133.99 61.14,133.24 61.14,132.19 59.12,130.18 J5.13
RIGHT_BT_S
  Top 0.305: C9.2 76.52,64.96 R11.2 76.52,69.53 U$9.P$1
  Bottom 0.305: J7.13 60.33,53.34 60.39,53.34 74.3,67.24 U$9.P$1
RIGHT_S
  Top 0.305: C7.2 5.27,22.54 R15.2 3.17,26.04 U$13.P$1 4.45,28.58 25.93,28.58 31.01,33.66 31.01,60.93 33.59,63.5 33.66,63.5 J6.18
RX
  Top 0.305: U$6.JP2.1 31.11,147.2 29.85,145.94 29.85,137.27 30.59,136.53 31.62,136.53 32.84,135.31 32.84,134.73 33.59,133.99 38.1,133.99 U$1.P$7
SCK
  Top 0.305: M1.5 49.54,105.42 49.54,107.2 52.13,109.8 52.13,124.97 53.42,126.26 55.8,126.26 56.48,125.58 56.48,124.61 54.61,122.75 U$1.P$31
SCL
  Top 0.305: U$1.P$15 J4.6
SCL_IMU
  Top 0.305: U$1.P$26 J5.15
SCL_IMU_S
  Top 0.305: R7.1 U1.SDA 46.91,57.23 46.91,56.97 47.7,56.19 56.44,56.19 57.4,57.15 J7.15
SCL_S
  Top 0.305: R8.1 U$3.3 43.79,30.51 43.79,30.73 36.42,38.1 33.59,38.1 32.84,37.36 32.84,36.3 33.59,35.56 33.66,35.56 J6.6
  Bottom 0.305: U$3.3 40.64,23.5 U$17.3
SDA
  Top 0.305: J4.7 U$1.P$14
SDA_IMU
  Top 0.305: U$1.P$25 J5.16
SDA_IMU_S
  Top 0.305: R6.1 U1.SCL 44.37,57.23 44.37,56.97 45.77,55.58 56.69,55.58 56.99,55.88 60.39,55.88 61.14,56.62 61.14,57.68 60.39,58.42 60.33,58.42 J7.16
SDA_S
  Top 0.305: R9.1 U$3.4 43.18,30.48 36.83,36.83 J6.7
  Bottom 0.305: U$3.4 43.94,28.58 45.2,29.84 46.24,29.84 46.98,29.1 46.98,28.05 43.18,24.25 U$17.4
SELECT
  Top 0.305: J4.20 U$1.P$1
SELECT2_S
  Top 0.305: C10.1 69.41,61.47 69.69,61.75 | 69.69,61.75 R21.2 | S2.B1A 73.5,61.75 69.69,61.75
  Bottom 0.305: S2.B1A 69.23,57.16 68.55,57.16 64.1,52.71 64.1,26.58 75.56,15.13 75.56,14.08 74.82,13.34 61.6,13.34 U$17.8
SELECT_S
  Top 0.305: C11.1 8.06,61.91 R22.2 13.65,61.91 S1.B1A
  Bottom 0.305: J6.20 33.66,68.58 25.4,68.58 18.42,61.59 S1.B1A
TX
  Top 0.305: U$6.JP2.2 31.11,144.66 32.84,142.93 32.84,137.27 33.59,136.53 38.1,136.53 U$1.P$6
UP
  Top 0.305: J4.19 U$1.P$2
UP_S
  Top 0.305: 20.26,67.42 20.26,69.1 19.68,69.67 U$12.P$1 | 20.26,67.42 19.99,67.15 19.84,67.15 R16.2 17.96,65.28 C6.2 | J6.19 20.37,67.31 20.26,67.42
VERTICAL
  Top 0.305: U$1.P$35 J5.6
VERTICAL2_S
  Bottom 0.305: S2.V2 64.71,46.93 64.71,26.84 76.17,15.38 76.17,13.83 75.07,12.73 63.53,12.73 U$17.9
VERTICAL_S
  Bottom 0.305: S1.V2 15.8,40.08 20.24,40.08 24.76,35.56 36.26,35.56 37.53,34.29 J7.6
VIN
  Top 0.305: U$4.IN+ 10.76,118.71 27.9,118.71 29.21,120.02 R13.2 29.53,119.75 30.48,118.8 32.17,118.8 32.44,118.53 32.44,115.15 27.3,110.02 27.3,98.77 29.48,96.6 41.21,96.6 43.7,99.09 45.79,99.09 50.93,93.94 53.52,93.94 56.09,96.52 K6.11
VIN_PIN
  Top 0.305: U$1.P$12 37.53,120.02 36.26,118.75 33.59,118.75 32.32,120.02 31.75,120.02 31.58,120.02 | 31.58,120.02 R13.1 | 31.58,120.02 30.37,121.22 28.69,121.22 27.48,120.02 D5.A